# Altium PCB PCB1.PcbDoc
Units mm, origin at the board's own origin, x right, y up, seen from the top; angles counter-clockwise.
Board outline 40 x 79.25 mm, 2 copper layers (Top Layer, Bottom Layer); 38 components, 18 nets, 103 pads, 0 vias.
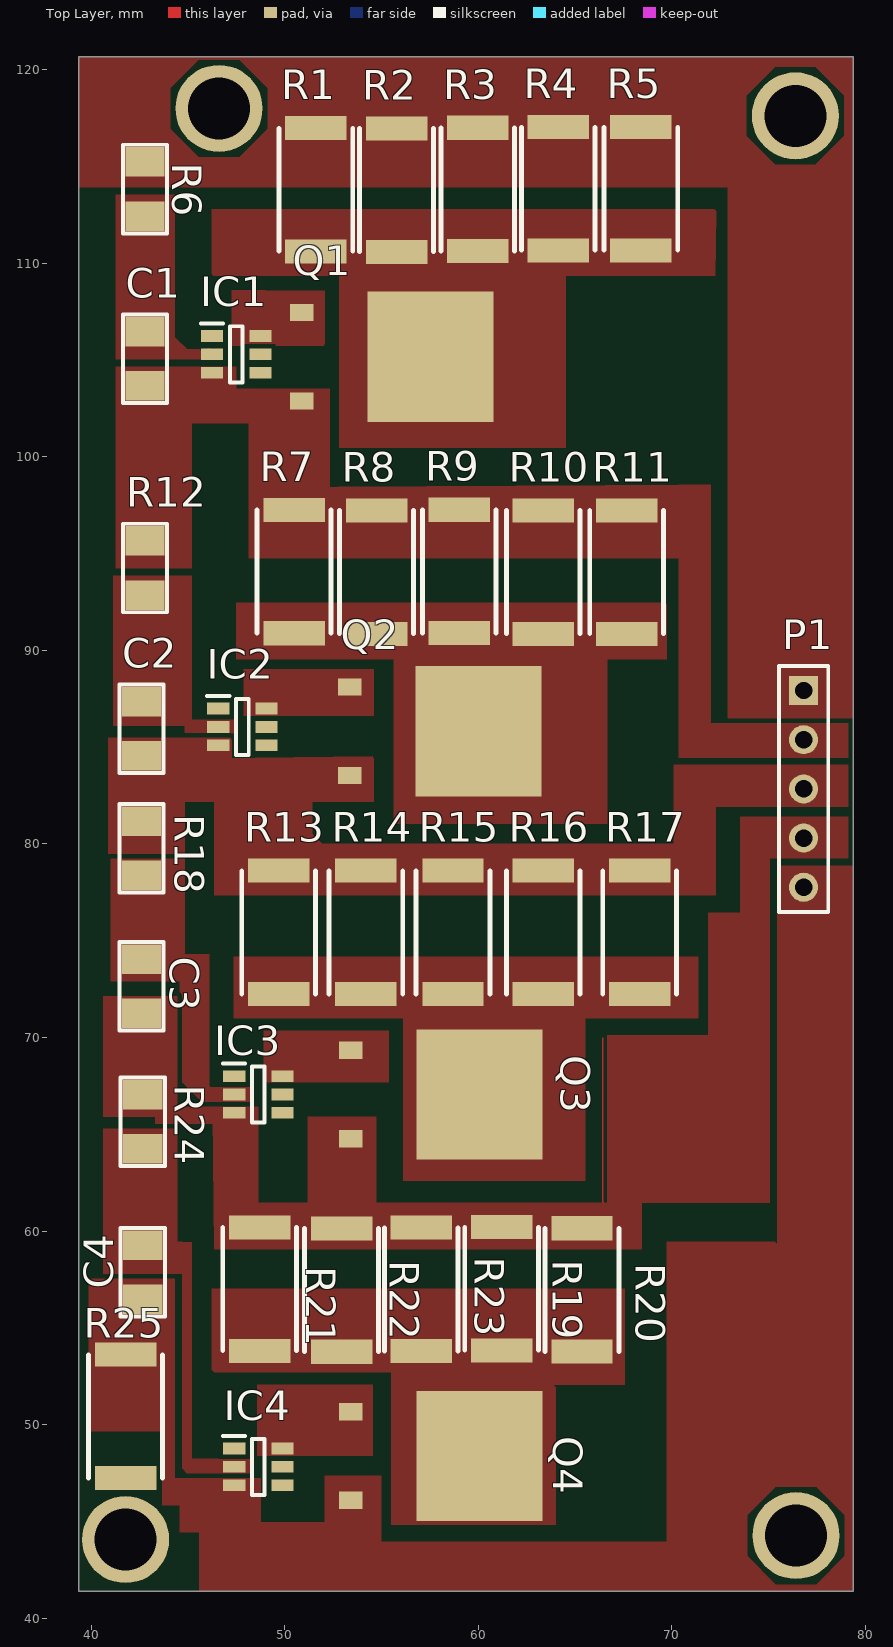
[diagram p0: Top Layer view]
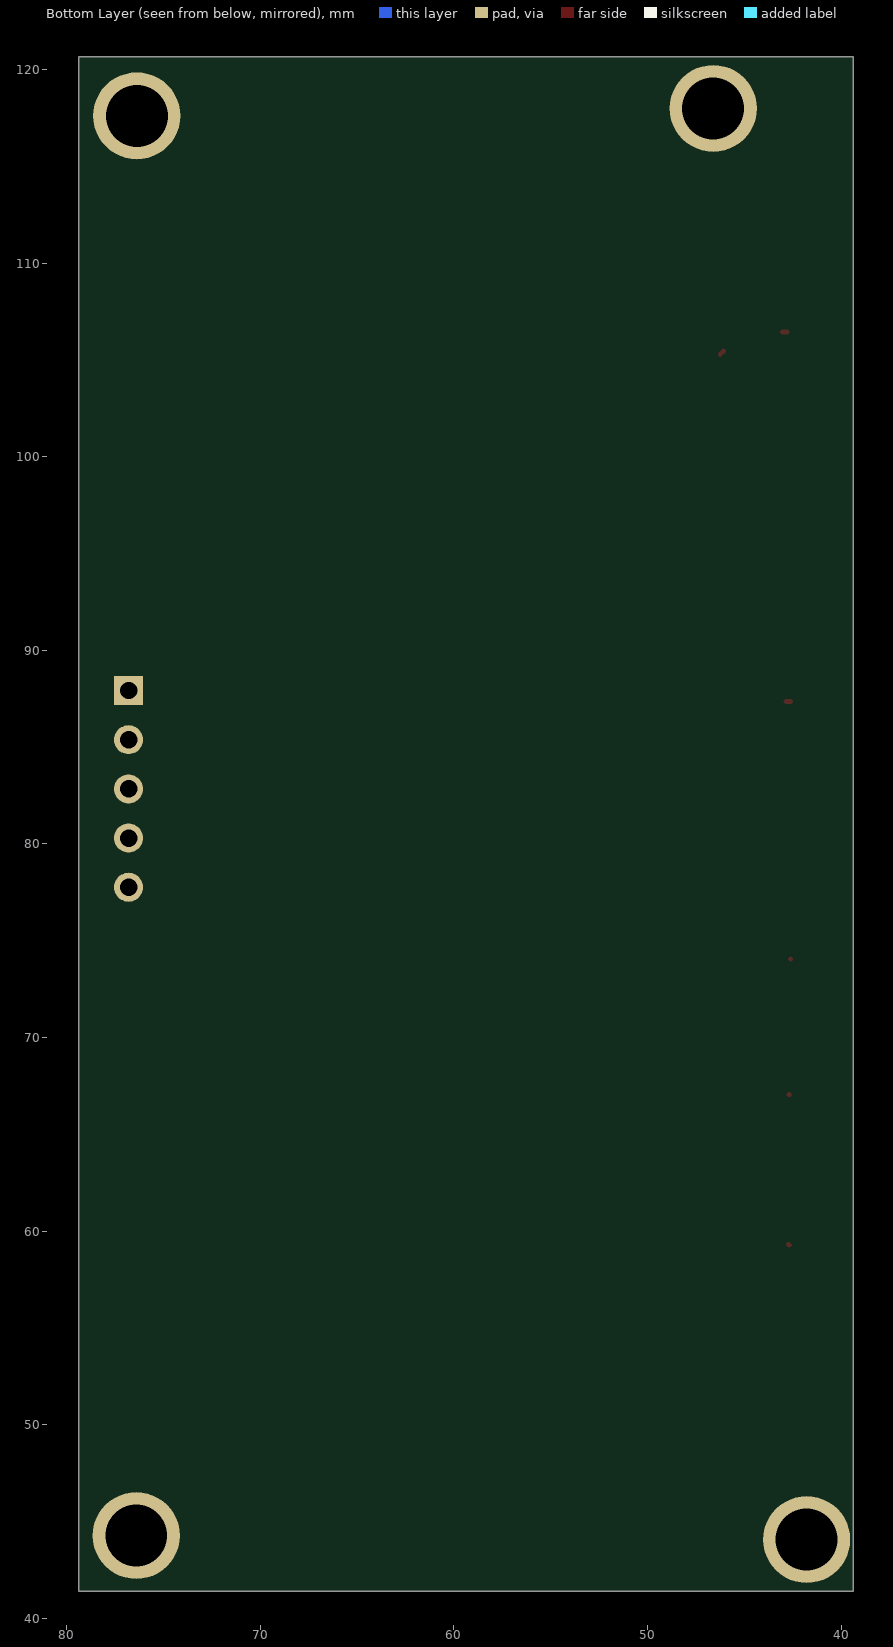
[diagram p1: Bottom Layer view, seen from below]
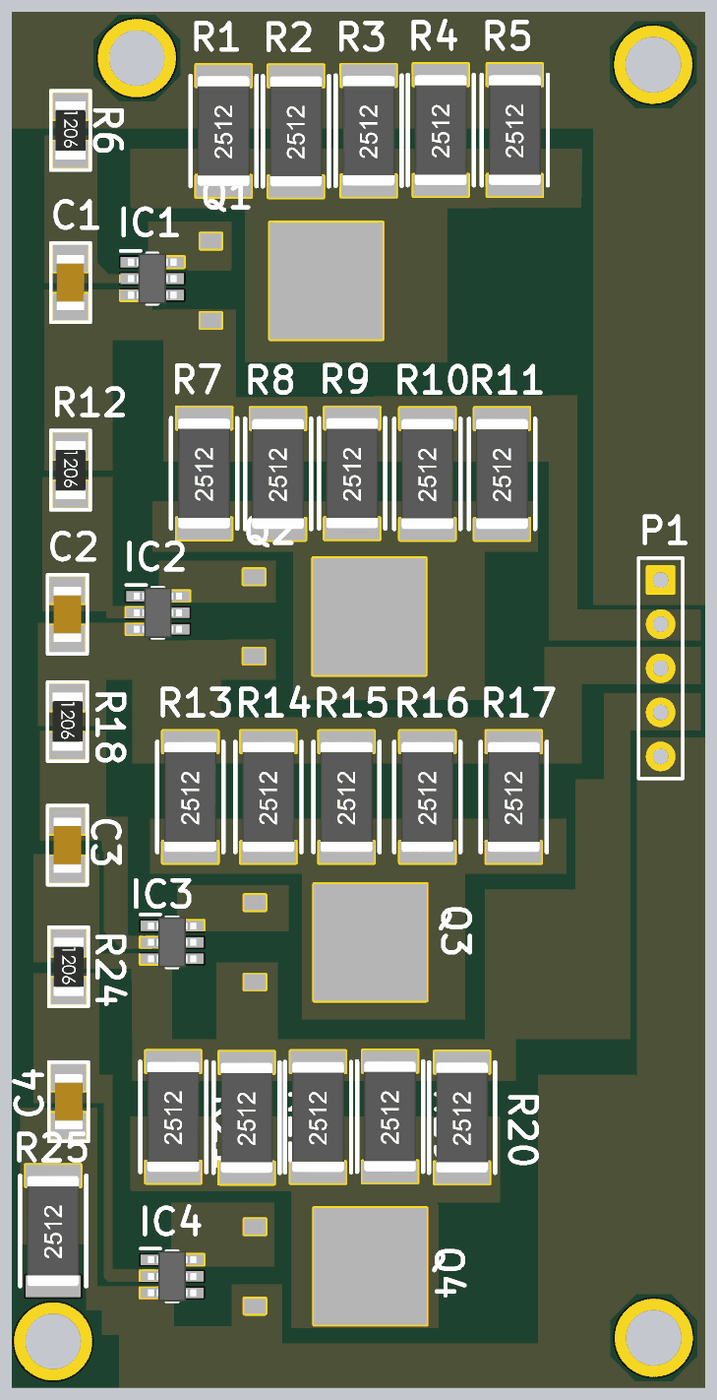
[diagram p2: 3D render of the assembled board from above, using the file's embedded part models]

## Layer stack, top to bottom
Top Solder: solder mask 0.0102, Solder Resist, Dk 3.5
Top Layer: signal copper 0.0356
Dielectric 1: dielectric 0.32, FR-4, Dk 4.8
Bottom Layer: signal copper 0.0356
Bottom Solder: solder mask 0.0102, Solder Resist, Dk 3.5

## Board outline
39.37,41.402 79.375,41.402 79.375,120.65 39.37,120.65

## Design rules (kind name [scope] priority, off if disabled: settings)
Clearance [All] p1: gap=0.254 ignorepadtopadclearanceinfootprint=FALSE except(0: Arc-Hole Track-Hole SMDPad-Hole THPad-Hole Via-Hole Fill-Hole Poly-Hole Region-Hole Text-Hole)
PolygonConnect [All] p1: connectstyle=Direct reliefconductorwidth=0.254 reliefentries=4 polygonreliefangle="90 Angle" airgapwidth=0.254
RoutingVias [All] p1: holewidth=0.711 width=1.27 viastyle="Through Hole" minholewidth=0.711 minwidth=1.27 maxholewidth=0.711 maxwidth=1.27
SolderMaskExpansion [All] p1: expansion=0.102 istentingtop=FALSE
Width [All] p1: maxlimit=0.254 minlimit=0.254 preferedwidth=0.254
30 further rules are at their usual default settings.

## Components (designator, comment, footprint, x,y, rotation, side; value= is the part's Value field where it differs from the comment)
C1 "C-1206" C1206 42.785,104.924 r180 top
C2 "C-1206" C1206 42.605,85.822 r180 top
C3 "C-1206" C1206 42.605,72.526 r180 top
C4 "C-1206" C1206 42.675,57.746 r180 top
IC1 "HY-2213-BB3A" HY223 47.498,105.283 r0 top
IC2 "HY-2213-BB3A" HY223 47.818,86.039 r0 top
IC3 "HY-2213-BB3A" HY223 48.641,67.056 r0 top
IC4 "HY-2213-BB3A" HY223 48.641,47.818 r0 top
P1 "Header 5" HDR1X5 76.806,87.92 r270 top
Q1 "TO252" TO252 57.531,105.156 r270 top
Q2 "TO252" TO252 60.017,85.822 r270 top
Q3 "TO252" TO252 60.071,67.056 r270 top
Q4 "TO252" TO252 60.071,48.387 r270 top
R1 "R2512" R2512 51.611,113.785 r90 top
R2 "R2512" R2512 55.781,113.767 r90 top
R3 "R2512" R2512 59.975,113.803 r90 top
R4 "R2512" R2512 64.133,113.838 r90 top
R5 "R2512" R2512 68.398,113.838 r90 top
R6 "R-1206" R1206 42.782,113.838 r180 top
R7 "R2512" R2512 50.487,94.065 r90 top
R8 "R2512" R2512 54.748,94.036 r90 top
R9 "R2512" R2512 59.02,94.069 r90 top
R10 "R2512" R2512 63.358,94.036 r90 top
R11 "R2512" R2512 67.663,94.036 r90 top
R12 "R-1206" R1206 42.785,94.265 r180 top
R13 "R2512" R2512 49.69,75.426 r90 top
R14 "R2512" R2512 54.193,75.426 r90 top
R15 "R2512" R2512 58.695,75.426 r90 top
R16 "R2512" R2512 63.358,75.426 r90 top
R17 "R2512" R2512 68.336,75.426 r90 top
R18 "R-1206" R1206 42.605,79.784 r180 top
R19 "R2512" R2512 61.208,57.021 r90 top
R20 "R2512" R2512 65.358,56.961 r90 top
R21 "R2512" R2512 48.709,57.003 r90 top
R22 "R2512" R2512 52.938,56.953 r90 top
R23 "R2512" R2512 57.056,56.987 r90 top
R24 "R-1206" R1206 42.672,65.659 r180 top
R25 "R2512" R2512 41.783,50.432 r90 top

## Footprints (in the part's own frame and the unit in brackets; to place one, negate y for a bottom-side part, rotate by r counter-clockwise, add the part's x,y. Pads: shape width x height; smd on the part's side, far side on the other; paste and mask are expansions set on the pad)
C1206 [mil]
  rect 80x60 smd: 1(0,50) 2(0,-60)
  silkscreen extent -45,-95 45,85, body extent -31,-68 32,58, height 39
HDR1X5 [mm] "Connector; Header; 5 Position"
  rect 1.5x1.5 hole 0.9: 1(0,0)
  round 1.5 hole 0.9: 2(2.54,0) 3(5.08,0) 4(7.62,0) 5(10.16,0)
  silkscreen extent -1.27,-1.27 11.43,1.27
HY223 [mm]
  rect 1.15x0.6 smd: 1(-1.25,0.95) 2(-1.25,0) 3(-1.25,-0.95) 4(1.25,-0.95) 5(1.25,0) 6(1.25,0.95)
  silkscreen extent -1.83,-1.45 0.33,1.6, body extent -1.4,-1.45 1.4,1.45, height 1.4
R1206 [mil]
  rect 80x60 smd: 1(-0.1,55.62) 2(-0.1,-54.38)
  silkscreen extent -45,-89 45,91, body extent -34,-65 34,67, height 33
R2512 [mil]
  rect 49x125 smd: 1(-125.5,0) 2(125.5,0)
  silkscreen extent -125,-75 125,75, body extent -125,-59 125,59, height 63
TO252 [mil]
  rect 35x48 smd: 1(-90,-262) 3(90,-262)
  rect 265x256 smd: 2(0,0)

## Part data
P1: "Header, 5-Pin", LatestRevisionDate=17-Jul-2002, LatestRevisionNote="Re-released for DXP Platform.", Publisher="Altium Limited"

## Free pads (board coordinates)
  round 4.5 hole 3.2: 3(41.783,44.069) 3(46.609,117.983) 3(76.381,117.603) 3(76.411,44.275)

## Nets (pads, with @x,y where several pads share a name; then routed paths per layer and width w, separated by ;. In a path a pad name is that pad's centre, name@x,y a point inside that pad or via, vN(x,y) a via of type N, cw(c..) or ccw(c..) an arc to the next point about the centre after c; other vN are vias at no path point)
GND: R25.1
NetC1_1: C1.1 IC1.3 P1.2 Q1.3 R7.2 R8.2 R9.2 R10.2 R11.2 R12.2
NetC1_2: C1.2 IC1.2 R6.1 | length 0.5
  Top Layer w0.254: C1.2 C1.2@43.039,106.448 ; IC1.2@46.075,105.456 IC1.2
NetC2_1: C2.1 IC2.3 P1.3 Q2.3 R13.2 R14.2 R15.2 R16.2 R17.2 R18.2
NetC2_2: C2.2 IC2.2 R12.1 | length 0.3
  Top Layer w0.254: C2.2 C2.2@42.859,87.346
NetC3_1: C3.1 IC3.3 P1.4 Q3.3 R19.2 R20.2 R21.2 R22.2 R23.2 R24.2 | length 0
  Top Layer w0.254: R24.2 R24.2@42.69,67.056
NetC3_2: C3.2 IC3.2 R18.1 | length 0
  Top Layer w0.254: C3.2 C3.2@42.614,74.041
NetC4_1: C4.1 IC4.3 P1.5 Q4.3 R25.2
NetC4_2: C4.2 IC4.2 R24.1 | length 0.1
  Top Layer w0.254: C4.2 C4.2@42.714,59.309
NetQ1_1: IC1.6 Q1.1
NetQ1_2: Q1.2 R1.1 R2.1 R3.1 R4.1 R5.1
NetQ2_1: IC2.6 Q2.1
NetQ2_2: Q2.2 R7.1 R8.1 R9.1 R10.1 R11.1
NetQ3_1: IC3.6 Q3.1
NetQ3_2: Q3.2 R13.1 R14.1 R15.1 R16.1 R17.1
NetQ4_1: IC4.6 Q4.1
NetQ4_2: Q4.2 R19.1 R20.1 R21.1 R22.1 R23.1
VCC: P1.1 R1.2 R2.2 R3.2 R4.2 R5.2 R6.2
pads on no net: IC1.1 IC1.4 IC1.5 IC2.1 IC2.4 IC2.5 IC3.1 IC3.4 IC3.5 IC4.1 IC4.4 IC4.5

## Polygon pours and split planes (outlines as drawn)
NetC4_2 on Top Layer "NETC4_2_L01_P061" (solid, pour order 61): 44.704,57.785 44.069,57.785 44.069,59.436 44.704,59.436 45.212,59.436 45.212,48.23 48.387,48.23 48.387,47.371 45.085,47.371 44.704,47.752
NetC4_2 on Top Layer "NETC4_2_L01_P035" (solid, pour order 35): 40.64,65.278 44.45,65.278 44.45,57.785 40.64,57.785
NetC1_2 on Top Layer "NETC1_2_L01_P006" (solid, pour order 6): 45.085,105.029 46.863,105.029 46.863,105.537 44.958,105.537 44.323,106.172 44.323,113.538 41.275,113.538 41.275,105.029
NetC3_1 on Top Layer "NETC3_1_L01_P060" (solid, pour order 60): 43.307,66.421 43.307,65.532 46.609,65.532 46.609,66.421
NetC3_2 on Top Layer "NETC3_2_L01_P059" (solid, pour order 59): 44.704,74.422 44.831,74.295 46.101,74.295 46.101,67.508 46.172,67.437 48.318,67.437 48.318,66.675 45.72,66.675 44.577,67.818 44.577,74.422
NetC3_1 on Top Layer "NETC3_1_L01_P034" (solid, pour order 34): 40.64,72.136 44.45,72.136 44.45,65.913 40.64,65.913
NetC3_1 on Top Layer "NETC3_1_L01_P036" (solid, pour order 36): 46.287,66.421 48.641,66.421 48.641,61.468 50.8,61.468 50.8,59.055 46.355,59.055
NetC3_2 on Top Layer "NETC3_2_L01_P032" (solid, pour order 32): 41.021,79.248 44.831,79.248 44.831,72.898 41.021,72.898
NetC2_2 on Top Layer "NETC2_2_L01_P056" (solid, pour order 56): 47.371,86.421 47.371,85.725 44.831,85.725 44.831,86.421
NetC2_2 on Top Layer "NETC2_2_L01_P023" (solid, pour order 23): 41.148,93.853 45.212,93.853 45.212,86.106 45.085,86.106 41.148,86.106
NetC4_1 on Top Layer "NETC4_1_L01_P051" (solid, pour order 51): 45.593,41.402 79.375,41.402 79.375,78.867 75.438,78.867 75.438,59.309 75.311,59.436 69.723,59.436 69.723,43.942 55.118,43.942 45.593,43.942
NetC4_1 on Top Layer "NETC4_1_L01_P054" (solid, pour order 54): 45.593,44.45 44.577,44.45 44.577,47.244 45.593,47.244
NetC4_1 on Top Layer "NETC4_1_L01_P052" (solid, pour order 52): 44.323,45.847 45.847,45.847 45.847,47.244 44.323,47.244 44.323,50.292 43.688,50.292 43.688,45.847
VCC on Top Layer "VCC_L01_P011" (solid, pour order 11): 72.898,114.681 72.898,86.487 79.375,86.487 79.375,114.427 79.121,114.681
VCC on Top Layer "3" (solid, pour order 7): 39.37,120.65 39.37,113.919 79.375,113.919 79.375,120.65
NetC3_1 on Top Layer "NETC3_1_L01_P049" (solid, pour order 49): 66.675,61.468 66.675,70.104 71.882,70.104 71.882,76.454 73.533,76.454 73.533,81.407 79.121,81.407 79.121,79.248 75.057,79.248 75.057,79.121 75.057,61.468
no net on Top Layer "NONET_L01_P048" (solid, pour order 48): 66.421,61.468 66.421,69.85 66.421,69.977
NetC3_1 on Top Layer "NETC3_1_L01_P047" (solid, pour order 47): 54.737,65.913 54.737,61.087 50.927,61.087 51.181,61.341 51.181,65.913
NetC4_1 on Top Layer "NETC4_1_L01_P046" (solid, pour order 46): 44.323,51.689 44.323,57.531 39.878,57.531 39.878,51.689
NetC4_1 on Top Layer "NETC4_1_L01_P044" (solid, pour order 44): 44.323,49.657 39.878,49.657 39.878,51.689 44.323,51.689
NetC4_1 on Top Layer "NETC4_1_L01_P043" (solid, pour order 43): 52.07,44.958 52.07,47.371 54.991,47.371 54.991,42.672 45.593,42.672 45.593,47.244 48.768,47.244 48.768,44.958
NetQ4_1 on Top Layer "NETQ4_1_L01_P042" (solid, pour order 42): 54.546,52.07 54.546,48.387 48.578,48.387 48.578,52.07
NetQ4_2 on Top Layer "NETQ4_2_L01_P041" (solid, pour order 41): 67.564,57.023 67.564,52.07 63.881,52.07 64.008,51.943 64.008,44.831 55.499,44.831 55.499,44.704 55.499,52.705 46.355,52.705 46.228,52.832 46.228,57.023
NetC3_1 on Top Layer "NETC3_1_L01_P040" (solid, pour order 40): 50.8,61.468 68.453,61.468 68.453,59.055 50.8,59.055
NetQ3_2 on Top Layer "NETQ3_2_L01_P039" (solid, pour order 39): 56.134,71.501 56.134,62.611 65.532,62.611 65.532,71.501
NetQ3_2 on Top Layer "NETQ3_2_L01_P038" (solid, pour order 38): 47.371,70.993 71.374,70.993 71.374,74.168 47.371,74.168
NetQ3_1 on Top Layer "NETQ3_1_L01_P037" (solid, pour order 37): 48.917,68.812 48.917,67.691 55.372,67.691 55.372,70.358 48.917,70.358
NetC2_1 on Top Layer "NETC2_1_L01_P031" (solid, pour order 31): 72.263,80.01 70.104,80.01 70.104,84.074 79.121,84.074 79.121,81.915 72.263,81.915
NetC2_1 on Top Layer "NETC2_1_L01_P030" (solid, pour order 30): 56.515,80.01 72.263,80.01 72.263,77.343 56.515,77.343
NetC2_1 on Top Layer "NETC2_1_L01_P029" (solid, pour order 29): 46.355,82.423 46.355,77.343 56.515,77.343 56.515,80.01 51.943,80.01 51.435,80.518 51.435,82.804
NetC2_1 on Top Layer "NETC2_1_L01_P028" (solid, pour order 28): 54.61,84.52 54.61,82.169 44.45,82.169 44.45,84.393
NetQ2_1 on Top Layer "NETQ2_1_L01_P027" (solid, pour order 27): 54.61,89.027 54.61,86.614 47.879,86.614 47.879,89.027
NetC2_1 on Top Layer "NETC2_1_L01_P026" (solid, pour order 26): 40.894,85.471 40.894,79.502 44.831,79.502 44.831,85.471
NetC2_1 on Top Layer "NETC2_1_L01_P025" (solid, pour order 25): 47.271,85.543 47.199,85.471 40.894,85.471 40.894,82.84 47.297,82.84
NetQ2_2 on Top Layer "NETQ2_2_L01_P022" (solid, pour order 22): 55.626,90.551 55.626,81.153 55.753,81.026 66.675,81.026 66.675,90.678
NetQ2_2 on Top Layer "NETQ2_2_L01_P021" (solid, pour order 21): 69.85,92.456 69.723,92.329 69.723,89.535 47.498,89.535 47.498,92.456
NetC1_1 on Top Layer "NETC1_1_L01_P019" (solid, pour order 19): 70.358,84.455 79.121,84.455 79.121,84.709 79.121,86.142 79.121,86.233 72.009,86.233 72.009,98.552 70.358,98.552 70.358,94.615
NetC1_1 on Top Layer "NETC1_1_L01_P018" (solid, pour order 18): 41.275,101.727 41.275,94.234 45.212,94.234 45.212,101.727
NetC1_1 on Top Layer "NETC1_1_L01_P017" (solid, pour order 17): 48.133,98.425 48.133,94.742 71.247,94.742 71.247,98.552
NetC1_1 on Top Layer "NETC1_1_L01_P016" (solid, pour order 16): 48.133,103.521 48.133,96.266 52.324,96.266 52.324,103.505
NetC1_1 on Top Layer "NETC1_1_L01_P015" (solid, pour order 15): 52.197,103.505 52.197,101.727 47.244,101.727 46.99,101.981 46.99,103.505
NetC1_1 on Top Layer "NETC1_1_L01_P012" (solid, pour order 12): 41.275,104.648 47.498,104.648 47.498,101.727 41.275,101.727
NetQ1_2 on Top Layer "NETQ1_2_L01_P010" (solid, pour order 10): 52.832,109.719 52.832,100.457 64.516,100.457 64.516,109.879
NetQ1_2 on Top Layer "NETQ1_2_L01_P009" (solid, pour order 9): 72.288,112.776 46.228,112.776 46.228,109.346 72.236,109.352
NetQ1_1 on Top Layer "NETQ1_1_L01_P008" (solid, pour order 8): 52.07,108.585 52.07,105.698 52.067,105.695 52.024,105.738 47.259,105.738 47.259,108.57 47.244,108.585